# Allegro board DIG_OUT_CARD.brd
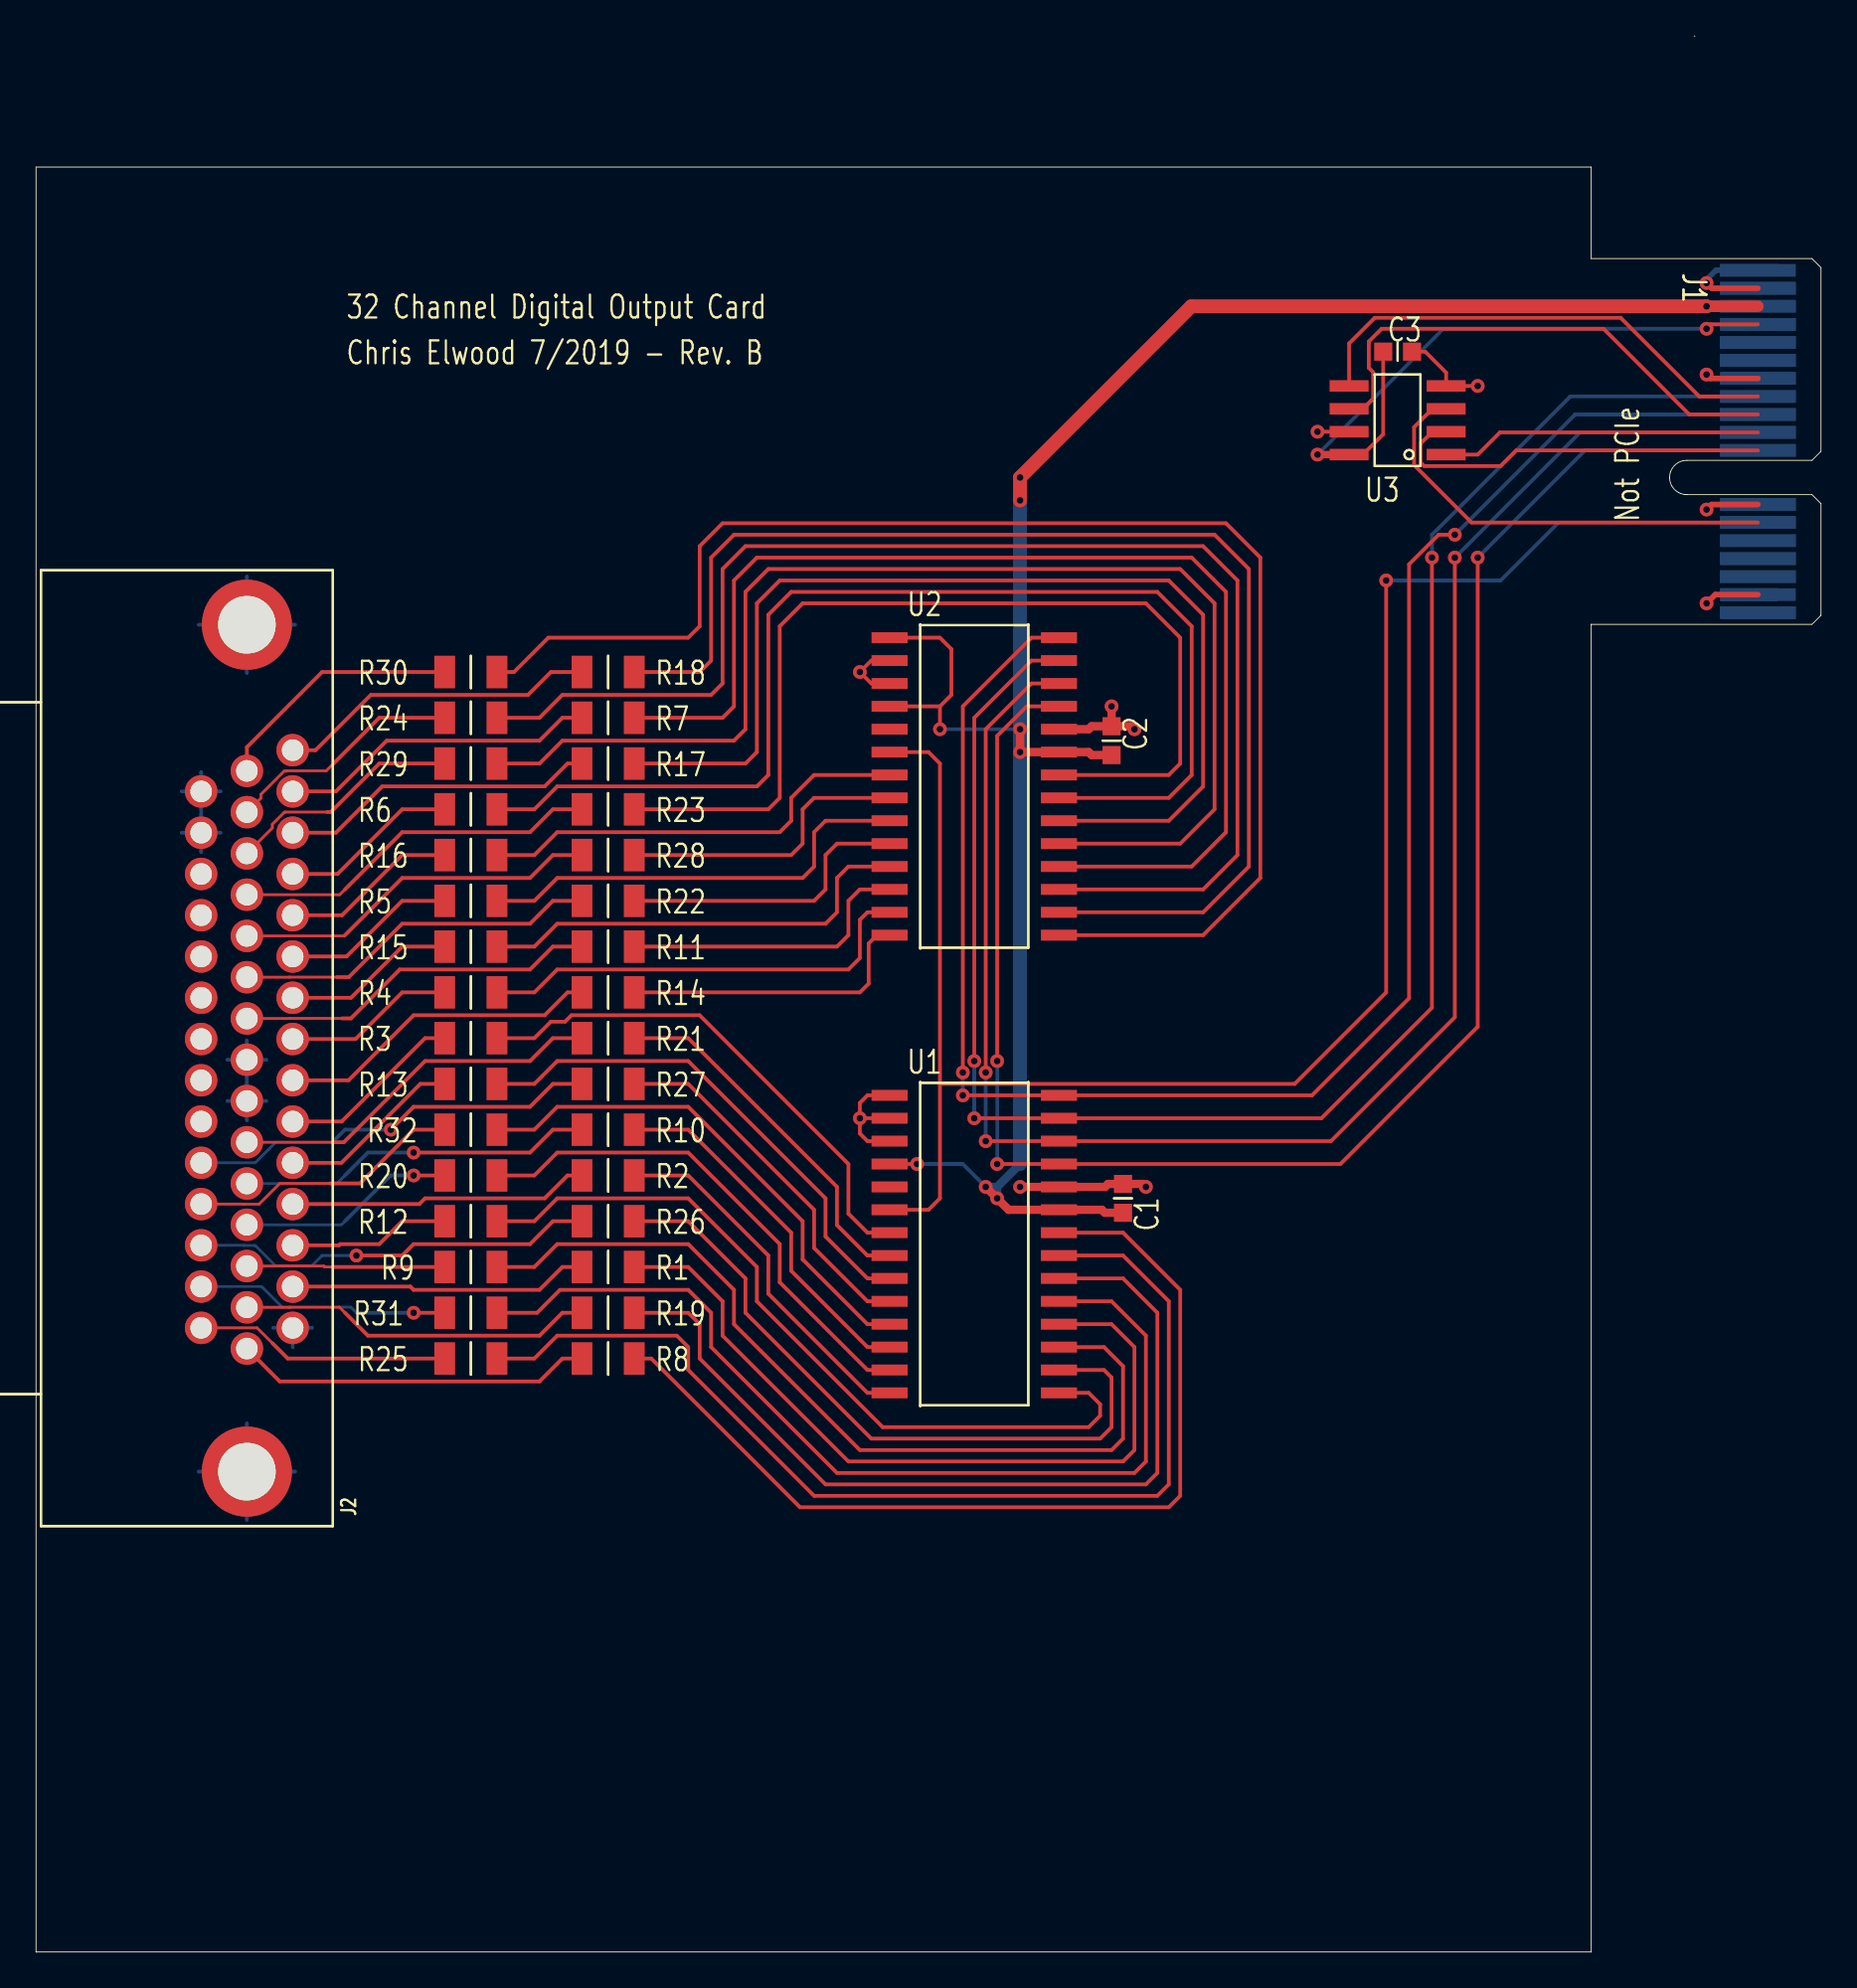
[diagram p0: board, top side]
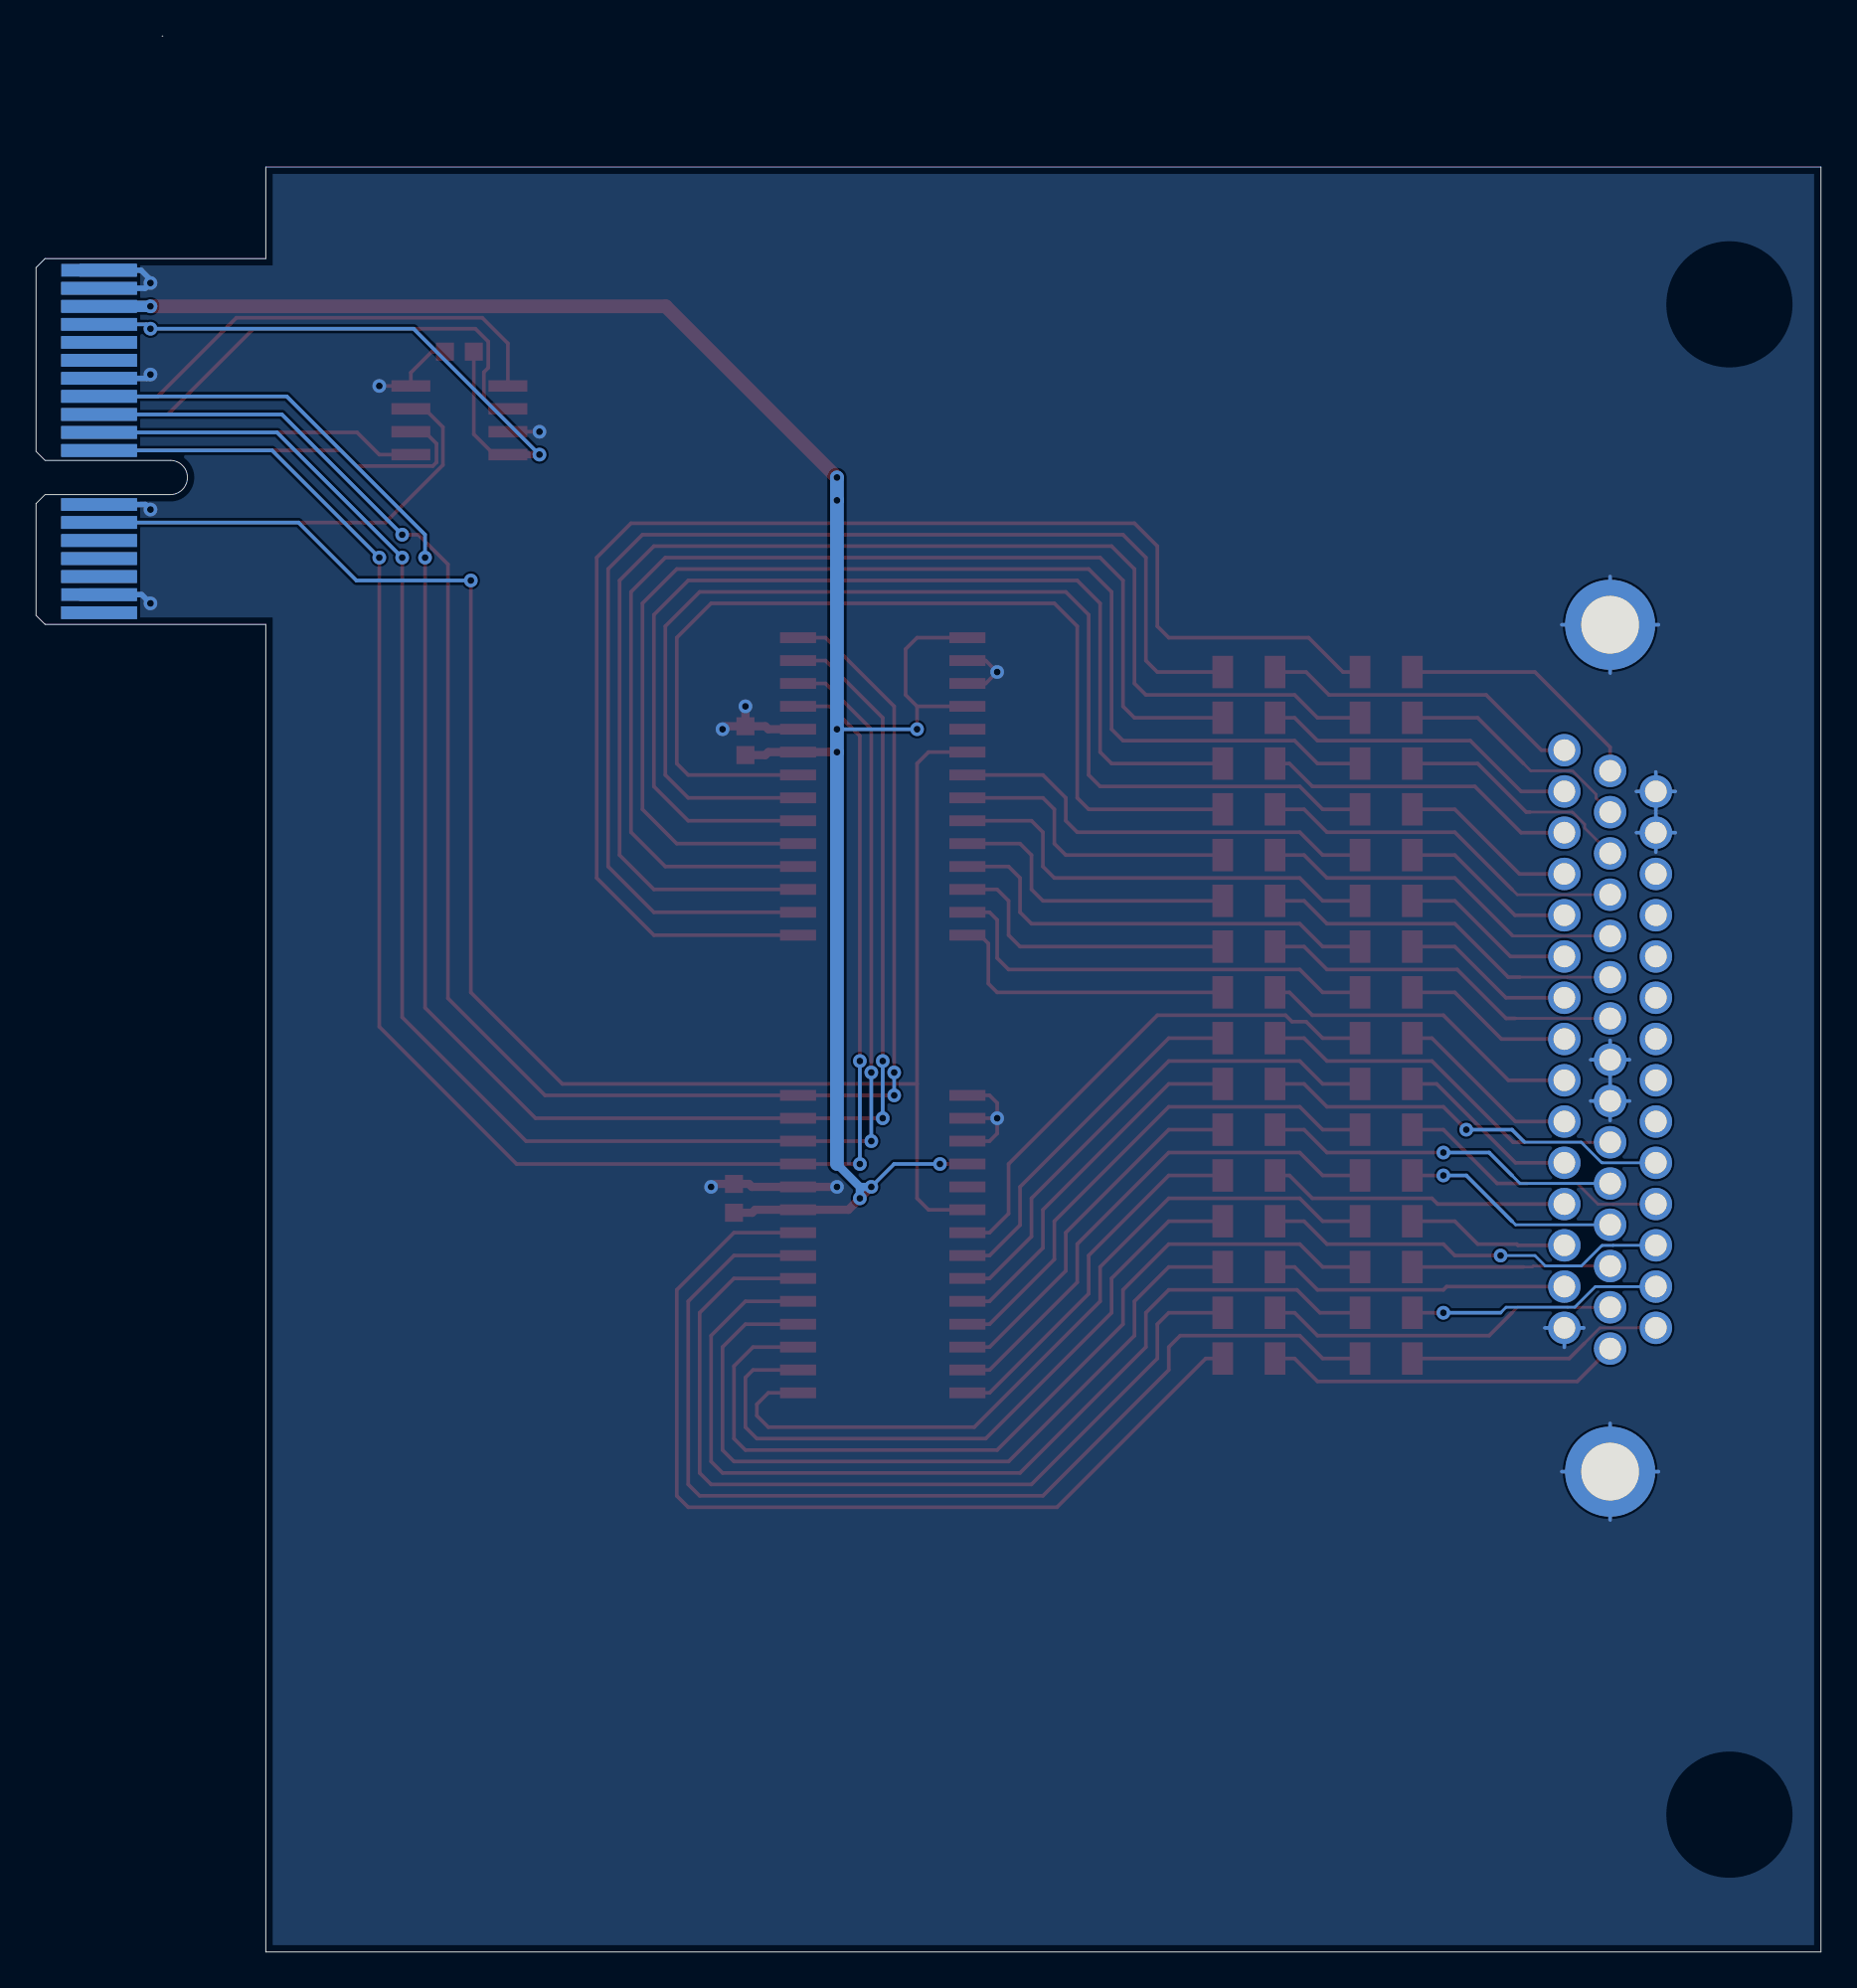
[diagram p1: board, bottom side, seen from below]

Outline 99.06 x 106.33 mm; copper layers: TOP, BOTTOM. Coordinates in mm from the lower left corner of the outline.
Outline path: 0,99.06 0,0 86.31,0 86.31,73.68 98.56,73.68 99.06,74.18 99.06,80.38 98.56,80.88 91.61,80.88 arc(90.66,81.83) 91.61,82.78 98.56,82.78 99.06,83.28 99.06,93.48 98.56,93.98 86.31,93.98 86.31,99.06 0,99.06

## Design rules (mm)
constraint set DEFAULT: min track width 0.203

## Placement (name value [footprint] x y rotation side)
C1  0.1uF  [CAP_0603]  60.32 41.82 90 top
C2  0.1uF  [CAP_0603]  59.69 67.22 90 top
C3  0.1uF  [CAP_0603]  75.56 88.81 0 top
J1  DAQ_EDGE_36  [EDGE_PCIE_36]  99.06 81.83 270 bottom
J2  -  [DB44HD]  11.7 50.16 90 top
NOREF  -  [unnamed]  5.08 7.62 0 top
NOREF#2  -  [unnamed]  5.08 91.44 0 top
R1  100  [RES_1206]  31.75 38.01 180 top
R2  100  [RES_1206]  31.75 43.09 180 top
R3  100  [RES_1206]  24.13 50.71 180 top
R4  100  [RES_1206]  24.13 53.25 180 top
R5  100  [RES_1206]  24.13 58.33 180 top
R6  100  [RES_1206]  24.13 63.41 180 top
R7  100  [RES_1206]  31.75 68.49 180 top
R8  100  [RES_1206]  31.75 32.93 180 top
R9  100  [RES_1206]  24.13 38.01 180 top
R10  100  [RES_1206]  31.75 45.63 180 top
R11  100  [RES_1206]  31.75 55.79 0 top
R12  100  [RES_1206]  24.13 40.55 180 top
R13  100  [RES_1206]  24.13 48.17 180 top
R14  100  [RES_1206]  31.75 53.25 180 top
R15  100  [RES_1206]  24.13 55.79 180 top
R16  100  [RES_1206]  24.13 60.87 180 top
R17  100  [RES_1206]  31.75 65.95 180 top
R18  100  [RES_1206]  31.75 71.03 180 top
R19  100  [RES_1206]  31.75 35.47 180 top
R20  100  [RES_1206]  24.13 43.09 180 top
R21  100  [RES_1206]  31.75 50.71 180 top
R22  100  [RES_1206]  31.75 58.33 0 top
R23  100  [RES_1206]  31.75 63.41 0 top
R24  100  [RES_1206]  24.13 68.49 0 top
R25  100  [RES_1206]  24.13 32.93 0 top
R26  100  [RES_1206]  31.75 40.55 0 top
R27  100  [RES_1206]  31.75 48.17 0 top
R28  100  [RES_1206]  31.75 60.87 0 top
R29  100  [RES_1206]  24.13 65.95 0 top
R30  100  [RES_1206]  24.13 71.03 0 top
R31  100  [RES_1206]  24.13 35.47 0 top
R32  100  [RES_1206]  24.13 45.63 0 top
U1  MCP23S17  [SOIC28W]  52.07 39.28 180 top
U2  MCP23S17  [SOIC28W]  52.07 64.68 180 top
U3  M24C02-FMN  [SOIC8]  75.56 85 180 top

## Library data of the parts
C1-C3 = CAP NP
J1 = DAQ_EDGE_36
J2 = DB44HD
R1-R32 = RESISTOR
U1 U2 = MCP23S17
U3 = M24C02-FMN

## Footprints (pads in the part's own frame, mm; a bottom-side part is the same pattern mirrored in y, then rotated)
CAP_0603
  rect 1x1 smd: 1(-0.8,0) 2(0.8,0)
DB44HD
  round 1.8 hole 1.2: 1(-15.52,-2.54) 2(-13.23,-2.54) 3(-10.94,-2.54) 4(-8.65,-2.54) 5(-6.36,-2.54) 6(-4.07,-2.54) 7(-1.78,-2.54) 8(0.51,-2.54) 9(2.8,-2.54) 10(5.09,-2.54) 11(7.38,-2.54) 12(9.67,-2.54) 13(11.96,-2.54) 14(14.25,-2.54) 15(16.54,-2.54) 16(-16.67,0) 17(-14.38,0) 18(-12.09,0) 19(-9.8,0) 20(-7.51,0) 21(-5.22,0) 22(-2.93,0) 23(-0.64,0) 24(1.65,0) 25(3.94,0) 26(6.23,0) 27(8.52,0) 28(10.81,0) 29(13.1,0) 30(15.39,0) 31(-15.52,2.54) 32(-13.23,2.54) 33(-10.94,2.54) 34(-8.65,2.54) 35(-6.36,2.54) 36(-4.07,2.54) 37(-1.78,2.54) 38(0.51,2.54) 39(2.8,2.54) 40(5.09,2.54) 41(7.38,2.54) 42(9.67,2.54) 43(11.96,2.54) 44(14.25,2.54)
  round 5 hole 3.2: 45(-23.5,0) 46(23.5,0)
EDGE_PCIE_36
  rect 0.7x3.2 smd: A1(-11.5,4) B17(6.5,4)
  rect 0.7x4.2 smd: A2(-10.5,3.5) A3(-9.5,3.5) A4(-8.5,3.5) A5(-7.5,3.5) A6(-6.5,3.5) A7(-5.5,3.5) A8(-4.5,3.5) A9(-3.5,3.5) A10(-2.5,3.5) A11(-1.5,3.5) A12(1.5,3.5) A13(2.5,3.5) A14(3.5,3.5) A15(4.5,3.5) A16(5.5,3.5) A17(6.5,3.5) A18(7.5,3.5) B1(-11.5,3.5) B2(-10.5,3.5) B3(-9.5,3.5) B4(-8.5,3.5) B5(-7.5,3.5) B6(-6.5,3.5) B7(-5.5,3.5) B8(-4.5,3.5) B9(-3.5,3.5) B10(-2.5,3.5) B11(-1.5,3.5) B12(1.5,3.5) B13(2.5,3.5) B14(3.5,3.5) B15(4.5,3.5) B16(5.5,3.5) B18(7.5,3.5)
RES_1206
  rect 1.15x1.8 smd: 1(-1.45,0) 2(1.45,0)
SOIC8
  rect 2.159x0.635 smd: 1(-2.692,1.905) 2(-2.692,0.635) 3(-2.692,-0.635) 4(-2.692,-1.905) 5(2.692,-1.905) 6(2.692,-0.635) 7(2.692,0.635) 8(2.692,1.905)
SOIC28W
  rect 2x0.6 smd: 1(-4.7,8.255) 2(-4.7,6.985) 3(-4.7,5.715) 4(-4.7,4.445) 5(-4.7,3.175) 6(-4.7,1.905) 7(-4.7,0.635) 8(-4.7,-0.635) 9(-4.7,-1.905) 10(-4.7,-3.175) 11(-4.7,-4.445) 12(-4.7,-5.715) 13(-4.7,-6.985) 14(-4.7,-8.255) 15(4.7,-8.255) 16(4.7,-6.985) 17(4.7,-5.715) 18(4.7,-4.445) 19(4.7,-3.175) 20(4.7,-1.905) 21(4.7,-0.635) 22(4.7,0.635) 23(4.7,1.905) 24(4.7,3.175) 25(4.7,4.445) 26(4.7,5.715) 27(4.7,6.985) 28(4.7,8.255)
unnamed
  round 0 hole 3.6: (0,0)

## Nets
3V3: C3.1 J1.A4 J1.B4 U3.8
5V0: C1.1 C2.1 J1.A3 J1.B3 U1.9(VDD) U1.18 U2.9(VDD) U2.15 U2.18
12V0: J1.A5 J1.A6 J1.B5 J1.B6
GND: C1.2 C2.2 C3.2 J1.A2 J1.A7 J1.A12 J1.A17 J1.B1 J1.B2 J1.B7 J1.B12 J1.B17 J2.1 J2.22 J2.23 J2.43 J2.44 J2.45 J2.46(S2) U1.10 U1.15 U1.16 U1.17 U2.10 U2.16 U2.17 U3.4 U3.7(W\P\)
A0: J1.A10 U3.1
A1: J1.A11 U3.2
A2: J1.A13 U3.3
CS: J1.B11 U1.11 U2.11
INT: J1.B13 U1.20 U2.20
IO0: R3.1 U1.21
IO1: R21.1 U1.22
IO2: R13.1 U1.23
IO3: R27.2 U1.24
IO4: R32.2 U1.25
IO5: R10.1 U1.26
IO6: R20.1 U1.27
IO7: R2.1 U1.28
IO8: R12.1 U1.1
IO9: R26.2 U1.2
IO10: R9.1 U1.3
IO11: R1.1 U1.4
IO12: R31.2 U1.5
IO13: R19.1 U1.6
IO14: R25.2 U1.7
IO15: R8.1 U1.8
IO16: R16.1 U2.21
IO17: R28.2 U2.22
IO18: R5.1 U2.23
IO19: R22.2 U2.24
IO20: R15.1 U2.25
IO21: R11.2 U2.26
IO22: R4.1 U2.27
IO23: R14.1 U2.28
IO24: R30.2 U2.1
IO25: R18.1 U2.2
IO26: R24.2 U2.3
IO27: R7.1 U2.4
IO28: R29.2 U2.5
IO29: R17.1 U2.6
IO30: R6.1 U2.7
IO31: R23.2 U2.8
MISO: J1.B9 U1.14 U2.14
MOSI: J1.B8 U1.13 U2.13
SCK: J1.B10 U1.12 U2.12
SCL: J1.A9 U3.6
SDA: J1.A8(SDA) U3.5
N01696: J2.2 R1.2
N01700: J2.3 R12.2
N01704: J2.4 R2.2
N01708: J2.6 R3.2
N01712: J2.8 R4.2
N01716: J2.10 R5.2
N01720: J2.12 R6.2
N01724: J2.14 R7.2
N01728: J2.16 R8.2
N01732: J2.18 R9.2
N01736: J2.20 R10.2
N01788: J2.21 R21.2
N01792: J2.19 R20.2
N01796: J2.17 R19.2
N01800: J2.15 R18.2
N01804: J2.13 R17.2
N01808: J2.11 R16.2
N01812: J2.9 R15.2
N01816: J2.7 R14.2
N01820: J2.5 R13.2
N03692: J2.35 R27.1
N03696: J2.33 R26.1
N03700: J2.31 R25.1
N03704: J2.29 R24.1
N03708: J2.27 R23.1
N03712: J2.25 R22.1
N03726: J2.24 R11.1
N03730: J2.26 R28.1
N03734: J2.28 R29.1
N03738: J2.30 R30.1
N03742: J2.32 R31.1
N03746: J2.34 R32.1

Pads without a net: J1 A1 A14 A15 A16 A18 B14 B15 B16 B18; J2 36 37 38 39 40 41 42; U1 19; U2 19

## Via types
v1: diameter 0.762, hole 0.381, TOP to BOTTOM, 41 vias

## Routing (per net, layer and track width the routed paths; a pad name or vN(x,y) marks a point on that pad's centre or on a via; arc(x,y) is an arc through that point)
3V3: length 39.1
  TOP w0.203: v1(92.71,90.08) 92.96,90.33 J1.A4 ; C3.1 74.76,84.23 73.63,83.1 U3.8
  TOP w0.406: v1(71.12,83.1) U3.8
  BOTTOM w0.203: v1(71.12,83.1) 78.11,90.08 v1(92.71,90.08) 92.96,90.33 J1.A4
5V0: length 126.3
  TOP w0.203: 50.16,69.13 50.8,69.76 50.8,72.3 50.16,72.94 U2.15 ; 50.16,69.13 U2.18 ; 50.16,69.13 v1(50.16,67.86) ; v1(48.89,43.73) U1.18
  TOP w0.457: v1(54.61,67.86) v1(54.61,66.59) U2.9 58.42,66.59 58.59,66.42 C2.1 ; v1(52.7,42.46) v1(53.34,41.82) 53.97,41.19 U1.9 59.15,41.19 59.32,41.02 C1.1
  TOP w0.635: J1.A3 v1(92.71,91.33)
  TOP w0.762: v1(54.61,80.56) v1(54.61,81.83) 64.11,91.33 v1(92.71,91.33)
  BOTTOM w0.203: v1(48.89,43.73) 51.43,43.73 v1(52.7,42.46) ; v1(50.16,67.86) v1(54.61,67.86)
  BOTTOM w0.457: 53.34,42.46 v1(53.34,41.82) ; 53.34,42.46 v1(52.7,42.46) ; 53.34,42.46 54.61,43.73
  BOTTOM w0.635: v1(92.71,91.33) J1.A3
  BOTTOM w0.762: 54.61,43.73 v1(54.61,66.59) v1(54.61,67.86) v1(54.61,80.56) v1(54.61,81.83)
GND: length 98.5
  TOP w0.203: U2.16 46.35,71.67 v1(45.72,71.03) 46.35,70.4 U2.17 ; U1.17 46.14,45 45.72,45.42 v1(45.72,46.27) ; U1.15 46.14,47.54 45.72,47.12 v1(45.72,46.27) ; v1(45.72,46.27) U1.16 ; U3.7 v1(71.12,84.37) ; v1(80.01,86.91) U3.4 78.26,87.65 77.09,88.81 C3.2 ; 57.78,67.86 U2.10
  TOP w0.305: J1.A7 92.92,87.33 v1(92.71,87.54) ; v1(92.71,80.05) 92.99,80.33 J1.A12 ; v1(92.71,74.84) 93.19,75.33 J1.A17 ; J1.A2 93,92.33 v1(92.71,92.62)
  TOP w0.457: C2.2 60.79,68.03 v1(60.96,67.86) ; C2.2 v1(59.69,69.13) ; C2.2 58.59,68.03 58.42,67.86 57.78,67.86 ; v1(54.61,42.46) U1.10 59.33,42.46 59.49,42.63 C1.2 61.43,42.63 v1(61.59,42.46)
  BOTTOM w0.203: 8.08,64.41 J2.44 ; J2.44 10.24,64.41 ; J2.44 9.16,65.49 ; J2.44 9.16,63.33 ; 9.16,61.04 J2.43 ; J2.43 9.16,63.2 ; J2.43 8.08,62.12 ; J2.43 10.24,62.12 ; J2.46 11.7,76.34 ; J2.46 11.7,70.98 ; J2.46 14.38,73.66 ; J2.46 9.02,73.66 ; 9.02,26.66 J2.45 ; J2.45 11.7,23.98 ; J2.45 11.7,29.34 ; J2.45 14.38,26.66 ; 11.7,46.15 J2.22 ; J2.22 11.7,48.31 ; J2.22 12.78,47.23 ; J2.22 10.62,47.23 ; 11.7,48.44 J2.23 ; J2.23 10.62,49.52 ; J2.23 12.78,49.52 ; J2.23 11.7,50.6 ; J2.1 15.32,34.64 ; J2.1 13.16,34.64 ; J2.1 14.24,33.56
  BOTTOM w0.305: v1(92.71,87.54) 92.92,87.33 J1.A7 ; J1.B17 93.19,75.33 v1(92.71,74.84) ; J1.A12 92.99,80.33 v1(92.71,80.05) ; J1.A2 93,92.33 v1(92.71,92.62) 92.71,92.81 93.23,93.33 J1.B1
A0: length 17.8
  TOP w0.203: J1.A10 81.24,84.33 80.01,83.1 U3.1
A1: length 21.9
  TOP w0.203: U3.2 77.5,84.37 76.84,83.71 76.84,82.67 77.04,82.46 81.28,82.46 82.15,83.33 J1.A11
A2: length 24.7
  TOP w0.203: U3.3 77.5,85.64 76.48,84.62 76.48,82.52 79.67,79.33 J1.A13
CS: length 101.7
  TOP w0.203: U2.11 54.98,69.13 53.34,67.49 v1(53.34,49.44) ; v1(80.01,77.38) 80.01,51.35 72.39,43.73 U1.11 v1(53.34,43.73)
  BOTTOM w0.203: v1(80.01,77.38) 85.96,83.33 J1.B11 ; v1(53.34,49.44) v1(53.34,43.73)
INT: length 101.9
  TOP w0.203: U2.20 49.53,66.59 50.16,65.95 50.16,48.17 ; 50.16,48.17 69.85,48.17 74.93,53.25 v1(74.93,76.11) ; 50.16,48.17 50.16,41.82 49.53,41.19 U1.20
  BOTTOM w0.203: v1(74.93,76.11) 81.28,76.11 84.49,79.33 J1.B13
IO0: length 28.9
  TOP w0.203: U1.21 46.14,39.92 45.09,40.98 45.09,43.73 36.83,51.98 29.71,51.98 29.36,51.63 28.57,51.63 27.65,50.71 R3.1
IO1: length 20.4
  TOP w0.203: R21.1 36.2,50.71 44.45,42.46 44.45,40.34 46.14,38.65 U1.22
IO2: length 28.6
  TOP w0.203: U1.23 46.14,37.38 43.81,39.71 43.81,41.82 36.2,49.44 28.92,49.44 27.65,48.17 R13.1
IO3: length 20.4
  TOP w0.203: U1.24 46.14,36.11 43.18,39.07 43.18,41.19 36.2,48.17 R27.2
IO4: length 28.6
  TOP w0.203: U1.25 46.14,34.84 42.54,38.44 42.54,40.55 36.2,46.9 28.92,46.9 27.65,45.63 R32.2
IO5: length 20.4
  TOP w0.203: R10.1 36.2,45.63 41.91,39.92 41.91,37.8 46.14,33.57 U1.26
IO6: length 28.6
  TOP w0.203: R20.1 27.65,43.09 28.92,44.36 36.2,44.36 41.27,39.28 41.27,37.17 46.14,32.3 U1.27
IO7: length 20.4
  TOP w0.203: U1.28 46.14,31.03 40.64,36.53 40.64,38.65 36.2,43.09 R2.1
IO8: length 43.8
  TOP w0.203: R12.1 27.65,40.55 28.92,41.82 36.2,41.82 40,38.01 40,36.11 46.99,29.12 58.42,29.12 59.05,29.76 59.05,30.39 58.42,31.03 U1.1
IO9: length 38.7
  TOP w0.203: U1.2 59.27,32.3 59.69,31.88 59.69,29.12 59.05,28.49 46.35,28.49 39.37,35.47 39.37,37.38 36.2,40.55 R26.2
IO10: length 49.4
  TOP w0.203: U1.3 59.27,33.57 60.32,32.51 60.32,28.49 59.69,27.85 45.72,27.85 38.73,34.84 38.73,36.74 36.2,39.28 28.92,39.28 27.65,38.01 R9.1
IO11: length 44
  TOP w0.203: R1.1 36.2,38.01 38.1,36.11 38.1,34.2 45.09,27.22 60.32,27.22 60.96,27.85 60.96,33.57 59.69,34.84 U1.4
IO12: length 54.7
  TOP w0.203: R31.2 27.81,35.47 29.08,36.74 36.2,36.74 37.46,35.47 37.46,33.57 44.45,26.58 60.96,26.58 61.59,27.22 61.59,34.2 59.69,36.11 U1.5
IO13: length 49.5
  TOP w0.203: R19.1 36.2,35.47 36.83,34.84 36.83,32.93 43.81,25.95 61.59,25.95 62.23,26.58 62.23,35.47 60.32,37.38 U1.6
IO14: length 59.8
  TOP w0.203: U1.7 60.32,38.65 62.86,36.11 62.86,25.95 62.23,25.31 43.18,25.31 36.2,32.3 36.2,33.57 35.56,34.2 28.92,34.2 27.65,32.93 R25.2
IO15: length 53.5
  TOP w0.203: U1.8 60.32,39.92 63.5,36.74 63.5,25.31 62.86,24.68 42.4,24.68 34.14,32.93 R8.1
IO16: length 24.4
  TOP w0.203: U2.21 43.18,65.32 41.91,64.05 41.91,62.78 41.27,62.14 28.92,62.14 27.65,60.87 R16.1
IO17: length 16.6
  TOP w0.203: U2.22 43.18,64.05 42.54,63.41 42.54,61.51 41.91,60.87 R28.2
IO18: length 24.7
  TOP w0.203: R5.1 27.65,58.33 28.92,59.6 42.54,59.6 43.18,60.24 43.18,62.14 43.81,62.78 U2.23
IO19: length 16.6
  TOP w0.203: R22.2 43.18,58.33 43.81,58.97 43.81,60.87 44.45,61.51 U2.24
IO20: length 24.7
  TOP w0.203: U2.25 45.09,60.24 44.45,59.6 44.45,57.7 43.81,57.06 28.92,57.06 27.65,55.79 R15.1
IO21: length 16.6
  TOP w0.203: R11.2 44.45,55.79 45.09,56.43 45.09,58.34 45.72,58.97 U2.26
IO22: length 24.9
  TOP w0.203: U2.27 46.14,57.7 45.72,57.28 45.72,55.16 45.09,54.52 28.92,54.52 27.65,53.25 R4.1
IO23: length 16.8
  TOP w0.203: U2.28 46.67,56.43 46.21,55.97 46.21,53.74 45.72,53.25 R14.1
IO24: length 79.4
  TOP w0.203: R30.2 26.52,71.03 28.43,72.94 36.2,72.94 36.83,73.57 36.83,78.02 38.1,79.29 66.04,79.29 67.95,77.38 67.95,59.6 64.77,56.43 U2.1
IO25: length 69.5
  TOP w0.203: U2.2 64.77,57.7 67.31,60.24 67.31,76.75 65.41,78.65 38.73,78.65 37.46,77.38 37.46,71.67 36.83,71.03 R18.1
IO26: length 75.5
  TOP w0.203: U2.3 64.77,58.97 66.67,60.87 66.67,76.11 64.77,78.02 39.37,78.02 38.1,76.75 38.1,70.4 37.46,69.76 29.21,69.76 27.94,68.49 R24.2
IO27: length 64.8
  TOP w0.203: U2.4 64.14,60.24 66.04,62.14 66.04,75.48 64.14,77.38 40,77.38 38.73,76.11 38.73,69.13 38.1,68.49 R7.1
IO28: length 70.4
  TOP w0.203: R29.2 27.94,65.95 29.21,67.22 38.73,67.22 39.37,67.86 39.37,75.48 40.64,76.75 63.5,76.75 65.41,74.84 65.41,63.41 63.5,61.51 U2.5
IO29: length 59.7
  TOP w0.203: U2.6 62.86,62.78 64.77,64.68 64.77,74.21 62.86,76.11 41.27,76.11 40,74.84 40,66.59 39.37,65.95 R17.1
IO30: length 65.7
  TOP w0.203: U2.7 62.86,64.05 64.14,65.32 64.14,73.57 62.23,75.48 41.91,75.48 40.64,74.21 40.64,65.32 40,64.68 28.92,64.68 27.65,63.41 R6.1
IO31: length 55.4
  TOP w0.203: U2.8 62.86,65.32 63.5,65.95 63.5,72.94 61.59,74.84 42.54,74.84 41.27,73.57 41.27,64.05 40.64,63.41 R23.2
MISO: length 102.4
  TOP w0.203: v1(51.43,47.54) U1.14 70.81,47.54 76.2,52.93 76.2,77.01 77.84,78.65 v1(78.74,78.65) ; v1(51.43,48.81) 51.43,69.13 55.24,72.94 U2.14
  BOTTOM w0.203: J1.B9 85.42,85.33 v1(78.74,78.65) ; v1(51.43,48.81) v1(51.43,47.54)
MOSI: length 103.7
  TOP w0.203: v1(52.07,46.27) U1.13 71.34,46.27 77.47,52.4 v1(77.47,77.38) ; U2.13 55.24,71.67 52.07,68.49 v1(52.07,49.44)
  BOTTOM w0.203: v1(77.47,77.38) 77.47,78.65 85.15,86.33 J1.B8 ; v1(52.07,49.44) v1(52.07,46.27)
SCK: length 102.1
  TOP w0.203: v1(52.7,48.81) 52.7,67.86 55.24,70.4 U2.12 ; v1(52.7,45) U1.12 71.86,45 78.74,51.88 v1(78.74,77.38)
  BOTTOM w0.203: v1(52.7,48.81) v1(52.7,45) ; J1.B10 85.69,84.33 v1(78.74,77.38)
SCL: length 28.7
  TOP w0.203: J1.A9 91.75,85.33 87,90.08 74.68,90.08 73.96,89.37 73.96,87.92 74.21,87.67 74.21,86.21 73.63,85.64 U3.6
SDA: length 27.4
  TOP w0.203: J1.A8 92.31,86.33 87.94,90.7 74.3,90.7 72.87,89.27 U3.5
N01696: length 16.7
  TOP w0.203: R1.2 29.21,38.01 27.94,36.74 20.96,36.74 20.77,36.93 J2.2
N01700: length 9
  TOP w0.203: R12.2 20.32,40.55 19.05,39.28 16.88,39.28 16.81,39.22 J2.3
N01704: length 16.7
  TOP w0.203: R2.2 29.5,43.09 28.23,41.82 21.59,41.82 21.27,41.51 J2.4
N01708: length 10.4
  TOP w0.203: J2.6 16.96,46.09 21.59,50.71 R3.2
N01712: length 9.5
  TOP w0.203: J2.8 17.73,50.67 20.32,53.25 R4.2
N01716: length 9.7
  TOP w0.203: J2.10 17.23,55.25 20.32,58.33 R5.2
N01720: length 9.9
  TOP w0.203: J2.12 16.73,59.83 20.32,63.41 R6.2
N01724: length 17.8
  TOP w0.203: R7.2 29.21,68.49 27.94,67.22 19.46,67.22 16.64,64.41 J2.14
N01728: length 19.9
  TOP w0.203: J2.16 13.52,31.66 27.94,31.66 29.21,32.93 R8.2
N01732: length 11
  TOP w0.152: 16.51,38.01 16.02,38.01 15.97,38.07 J2.18
  TOP w0.203: 16.51,38.01 R9.2
N01736: length 19.8
  TOP w0.203: v1(20.96,44.36) 27.41,44.36 28.68,45.63 R10.2
  BOTTOM w0.152: J2.20 16.7,42.65 17.14,43.09
  BOTTOM w0.203: 17.14,43.09 18.41,44.36 v1(20.96,44.36)
N01788: length 21
  TOP w0.152: 16.45,44.94 J2.21
  TOP w0.203: 16.45,44.94 17.08,44.94 21.59,49.44 27.41,49.44 28.68,50.71 R21.2
N01792: length 12.1
  TOP w0.203: R20.2 v1(20.96,43.09)
  BOTTOM w0.152: 17.14,40.55 16.95,40.36 J2.19
  BOTTOM w0.203: 17.14,40.55 19.68,43.09 v1(20.96,43.09)
N01796: length 19.8
  TOP w0.152: 17.14,35.47 16.84,35.78 14.08,35.78 14.08,35.78 J2.17
  TOP w0.203: R19.2 29.21,35.47 27.94,34.2 18.41,34.2 17.14,35.47
N01800: length 17.9
  TOP w0.203: J2.15 15.51,66.7 18.58,69.76 27.3,69.76 28.57,71.03 R18.2
N01804: length 17.6
  TOP w0.203: J2.13 16.64,62.12 19.21,64.68 28.23,64.68 29.5,65.95 R17.2
N01808: length 9.8
  TOP w0.203: J2.11 16.98,57.54 20.32,60.87 R16.2
N01812: length 9.6
  TOP w0.203: R15.2 20.32,55.79 17.48,52.96 J2.9
N01816: length 18.1
  TOP w0.203: R14.2 29.5,53.25 28.23,51.98 20.96,51.98 17.35,48.38 J2.7
N01820: length 10.3
  TOP w0.203: R13.2 21.33,48.17 16.95,43.8 J2.5
N03692: length 23
  TOP w0.203: R27.1 28.68,48.17 27.41,46.9 20.96,46.9 v1(19.68,45.63)
  BOTTOM w0.152: J2.35 12.13,43.8 12.14,43.81 12.17,43.81 13.3,44.94 16.45,44.94 16.51,45
  BOTTOM w0.203: 16.51,45 17.14,45.63 v1(19.68,45.63)
N03696: length 22.6
  TOP w0.203: v1(17.78,38.65) 20.32,38.65 20.95,39.28 27.41,39.28 28.68,40.55 R26.1
  BOTTOM w0.152: J2.33 11.54,39.22 11.54,39.21 12.14,39.21 12.15,39.2 12.17,39.2 13.29,38.07 15.3,38.07 15.88,38.65 v1(17.78,38.65)
N03700: length 14.2
  TOP w0.152: 13.13,33.77 12.27,34.64 J2.31
  TOP w0.203: R25.1 13.97,32.93 13.13,33.77
N03704: length 13.3
  TOP w0.152: J2.29 12.48,64.04 12.48,64.24 13.77,65.54 13.89,65.54 13.9,65.55 16.11,65.55 16.51,65.95
  TOP w0.203: 16.51,65.95 19.05,68.49 R24.1
N03708: length 20.6
  TOP w0.152: 17.14,58.97 16.85,58.68 J2.27
  TOP w0.203: 17.14,58.97 20.32,62.14 27.41,62.14 28.68,63.41 R23.1
N03712: length 20.4
  TOP w0.152: J2.25 14.08,54.1 14.08,54.1 16.72,54.1
  TOP w0.203: R22.1 28.68,58.33 27.41,57.06 20.32,57.06 17.36,54.1 16.72,54.1
N03726: length 20.2
  TOP w0.152: J2.24 14.08,51.81 14.08,51.81 16.97,51.81
  TOP w0.203: 16.97,51.81 17.47,51.81 20.19,54.52 27.41,54.52 28.68,55.79 R11.1
N03730: length 20.5
  TOP w0.152: 17.14,56.43 17.1,56.39 J2.26
  TOP w0.203: 17.14,56.43 20.32,59.6 27.41,59.6 28.68,60.87 R28.1
N03734: length 13.2
  TOP w0.152: 16.15,63.26 13.82,63.26 13.8,63.25 13.77,63.25 13.11,62.58 13.11,62.38 J2.28
  TOP w0.203: 16.15,63.26 16.36,63.26 19.05,65.95 R29.1
N03738: length 14
  TOP w0.203: J2.30 11.7,66.86 15.88,71.03 R30.1
N03742: length 14.1
  TOP w0.203: R31.1 v1(20.96,35.47)
  BOTTOM w0.152: J2.32 12.52,36.93 13.66,35.78 17.47,35.78 17.78,35.47
  BOTTOM w0.203: 17.78,35.47 v1(20.96,35.47)
N03746: length 15.2
  TOP w0.152: J2.34 11.54,41.51 11.54,41.5 12.38,41.5 13.53,42.65 16.32,42.65
  TOP w0.203: R32.1 20.96,45.63 17.97,42.65 16.32,42.65

## Copper pours and planes (outline as drawn; the poured copper is in the pictures)
GND on BOTTOM: 0,98.97 86.31,99.06 86.31,93.98 93.28,93.98 93.28,73.68 86.31,73.68 86.31,0 0,0

## Text on the board
Ref Des/Silkscreen Top: 32 Channel Digital Output Card | Chris Elwood 7/2019 - Rev. B | Not PCIe
